# EAGLE board 4x4_hirose (EAGLE 7.2.0)
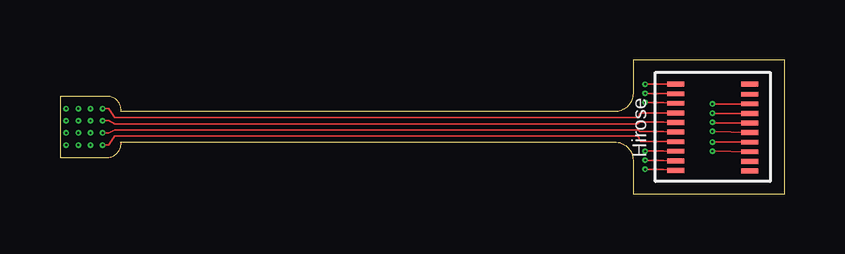
[diagram p0: board, top side]
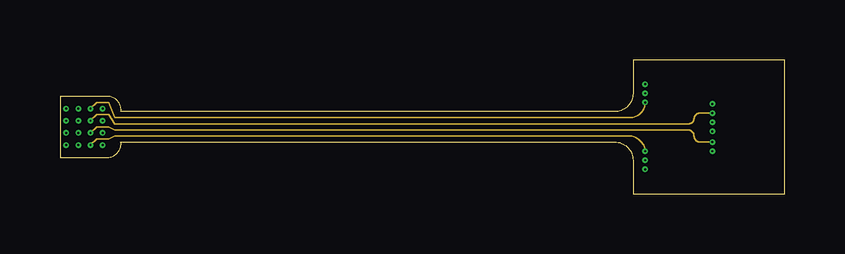
[diagram p1: board, inner layer Route2]
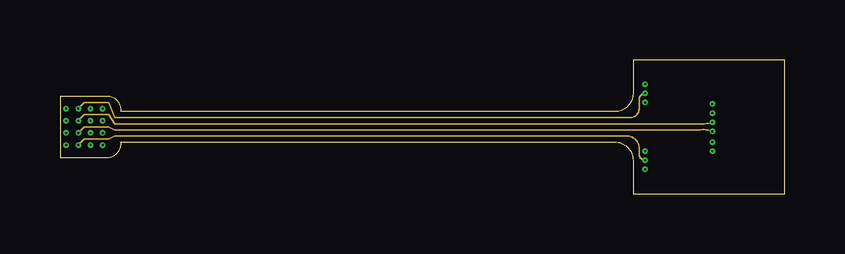
[diagram p2: board, inner layer Route15]
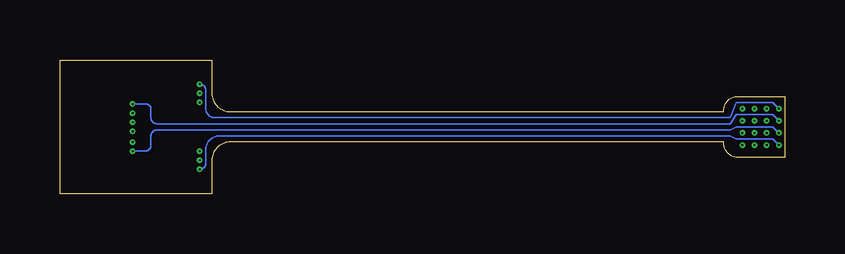
[diagram p3: board, bottom side, seen from below]

Size 30.21 x 5.59 mm. Coordinates in mm from the lower left corner, seen from the top.
Outline: 0,1.52 2.03,1.52 arc90 2.54,2.16 23.11,2.16 arc-90 23.88,1.4 23.88,0 30.21,0 30.21,5.59 23.88,5.59 23.88,4.19 arc-90 23.11,3.43 2.54,3.43 arc90 2.03,4.06 0,4.06 0,1.52
Copper layers (1*2*15*16): Top 0.035mm / dielectric 1.5mm / Route2 0.035mm / dielectric 0.15mm / Route15 0.035mm / dielectric 0.2mm / Bottom 0.035mm
Design rules "default *": minimum track width 3mil, minimum drill 0.1mm, track to track 0.15mm, track to pad 0.15mm, pad to pad 0.15mm, via to via 0.15mm, smd to smd 0.15mm, copper to edge 40mil, drill to drill 0.15mm, minimum pad ring 3mil, minimum via ring 3mil, stop-mask expansion 4mil, vias tented up to drill 0mil, thermal gap 10mil

## Footprints (pad centres in the part's own frame; a part is rotated, then mirrored left to right if it is on the bottom)
GG_4X4_ARRAY = drill 0.076 pad 0.178: P$1 0,0; P$2 0.508,0; P$3 1.016,0; P$4 1.524,0; P$5 0,-0.508; P$6 0.508,-0.508; P$7 1.016,-0.508; P$8 1.524,-0.508; P$9 0,-1.016; P$10 0.508,-1.016; P$11 1.016,-1.016; P$12 1.524,-1.016; P$13 0,-1.524; P$14 0.508,-1.524; P$15 1.016,-1.524; P$16 1.524,-1.524
HIROSE_DF40C-70DS = smd 0.2 x 0.7: P$1 0,0; P$2 -0.4,0; P$3 -0.8,0; P$4 -1.2,0; P$5 -1.6,0; P$6 -2,0; P$7 -2.4,0; P$8 -2.8,0; P$9 -3.2,0; P$10 -3.6,0; P$36 0,-3.08; P$37 -0.42,-3.08; P$38 -0.82,-3.08; P$39 -1.22,-3.08; P$40 -1.62,-3.08; P$41 -2.02,-3.08; P$42 -2.42,-3.08; P$43 -2.82,-3.08; P$44 -3.22,-3.08; P$45 -3.62,-3.08

## Placement (x,y rotation side)
U$1  GG_4X4_ARRAY  [GG_4X4_ARRAY]  0.25,3.56 0 top
U$3  HIROSE_DF40_70PIN  [HIROSE_DF40C-70DS]  25.65,4.57 90 top

## Library data of the parts
U$1 = GG_4x4_3mildrill_20milspacing
U$3 = GG_hirose20

## Nets
N$20: U$1.P$1 U$3.P$1
N$30: U$1.P$2 U$3.P$2
N$40: U$1.P$3 U$3.P$3
N$50: U$1.P$4 U$3.P$4
N$60: U$1.P$5 U$3.P$38
N$70: U$1.P$6 U$3.P$40
N$80: U$1.P$7 U$3.P$39
N$90: U$1.P$8 U$3.P$5
N$100: U$1.P$9 U$3.P$43
N$110: U$1.P$10 U$3.P$41
N$120: U$1.P$11 U$3.P$42
N$130: U$1.P$12 U$3.P$6
N$140: U$1.P$13 U$3.P$10
N$150: U$1.P$14 U$3.P$9
N$160: U$1.P$15 U$3.P$8
N$170: U$1.P$16 U$3.P$7

## Tracks (layer width: path | path; a pad name or v marks a point on that pad's centre or on a via)
N$20  (via drill 0.08)
  Top 0.07: v24.38,4.57 U$3.P$1
  Bottom 0.07: U$1.P$1 0.51,3.81 2.03,3.81 2.29,3.17 23.75,3.17 arc90 24.13,3.56 24.13,4.32 arc-90 v24.38,4.57
N$30  (via drill 0.08)
  Top 0.07: v24.38,4.19 25.15,4.19 U$3.P$2
  Route15 0.07: U$1.P$2 1.02,3.81 2.03,3.81 2.29,3.17 23.75,3.17 arc90 24.13,3.56 24.13,3.94 arc-90 v24.38,4.19
N$40  (via drill 0.08)
  Top 0.07: v24.38,3.81 25.15,3.81 U$3.P$3
  Route2 0.07: U$1.P$3 1.52,3.81 2.03,3.81 2.29,3.17 23.75,3.17 arc90 v24.38,3.81
N$50
  Top 0.07: U$1.P$4 2.03,3.56 2.29,3.17 24,3.17 arc90 24.13,3.3 arc-90 24.23,3.37 25.15,3.37 U$3.P$4
N$60  (via drill 0.08)
  Top 0.07: U$3.P$38 v27.18,3.75
  Bottom 0.07: U$1.P$5 0.51,3.3 2.03,3.3 2.29,2.92 26.16,2.92 arc90 26.42,3.17 26.42,3.56 arc-90 26.67,3.75 v27.18,3.75
N$70  (via drill 0.08)
  Top 0.07: U$3.P$40 27.18,2.95 v27.18,2.98
  Route15 0.07: U$1.P$6 1.02,3.3 2.03,3.3 2.29,2.92 26.67,2.92 arc28 v27.18,2.98
N$80  (via drill 0.08)
  Top 0.07: U$3.P$39 27.18,3.35 v27.18,3.37
  Route2 0.07: U$1.P$7 1.52,3.3 2.03,3.3 2.29,2.92 26.16,2.92 arc90 26.42,3.11 arc-90 26.67,3.37 v27.18,3.37
N$90
  Top 0.07: U$1.P$8 2.03,3.05 2.29,2.92 24.07,2.92 arc90 24.13,2.98 25.15,2.98 U$3.P$5
N$100  (via drill 0.08)
  Top 0.07: U$3.P$43 v27.18,1.78
  Bottom 0.07: U$1.P$9 0.51,2.79 2.03,2.79 2.29,2.67 26.16,2.67 arc-90 26.42,2.41 26.42,2.03 arc90 26.67,1.78 v27.18,1.78
N$110  (via drill 0.08)
  Top 0.07: U$3.P$41 v27.18,2.6
  Route15 0.07: U$1.P$10 1.02,2.79 2.03,2.79 2.29,2.67 26.67,2.67 arc-28 v27.18,2.6
N$120  (via drill 0.08)
  Top 0.07: U$3.P$42 v27.18,2.16
  Route2 0.07: U$1.P$11 1.52,2.79 2.03,2.79 2.29,2.67 26.16,2.67 arc-90 26.42,2.41 arc90 26.67,2.16 v27.18,2.16
N$130
  Top 0.07: U$1.P$12 2.03,2.54 2.29,2.67 24.07,2.67 arc-90 24.13,2.6 25.15,2.6 U$3.P$6
N$140  (via drill 0.08)
  Top 0.07: v24.38,1.02 25.15,1.02 U$3.P$10
  Bottom 0.07: U$1.P$13 0.51,2.29 2.03,2.29 2.29,2.41 23.62,2.41 arc-90 24.13,1.78 24.13,1.27 arc90 v24.38,1.02
N$150  (via drill 0.08)
  Top 0.07: v24.38,1.4 25.15,1.4 U$3.P$9
  Route15 0.07: U$1.P$14 1.02,2.29 2.03,2.29 2.29,2.41 23.62,2.41 arc-90 24.13,1.91 24.13,1.65 arc90 v24.38,1.4
N$160  (via drill 0.08)
  Top 0.07: v24.38,1.78 25.15,1.78 U$3.P$8
  Route2 0.07: U$1.P$15 1.52,2.29 2.03,2.29 2.29,2.41 23.62,2.41 arc-90 v24.38,1.78
N$170
  Top 0.07: U$1.P$16 2.03,2.03 2.29,2.41 24,2.41 arc-90 24.13,2.29 arc90 24.23,2.18 25.15,2.18 U$3.P$7